# Altium PCB HMC1053-array.PcbDoc (part 2 of 4)
Units mm, origin at the board's own origin, x right, y up, seen from the top; angles counter-clockwise.
Board outline 90 x 90 mm, 4 copper layers (Top Layer (Signal), Int1 (GND), Int2 (Signal), Bottom Layer (Signal)), stack 1.586 mm thick; 151 components, 306 nets, 1178 pads, 350 vias.
Unrouted connection lines stored in the file: 80.
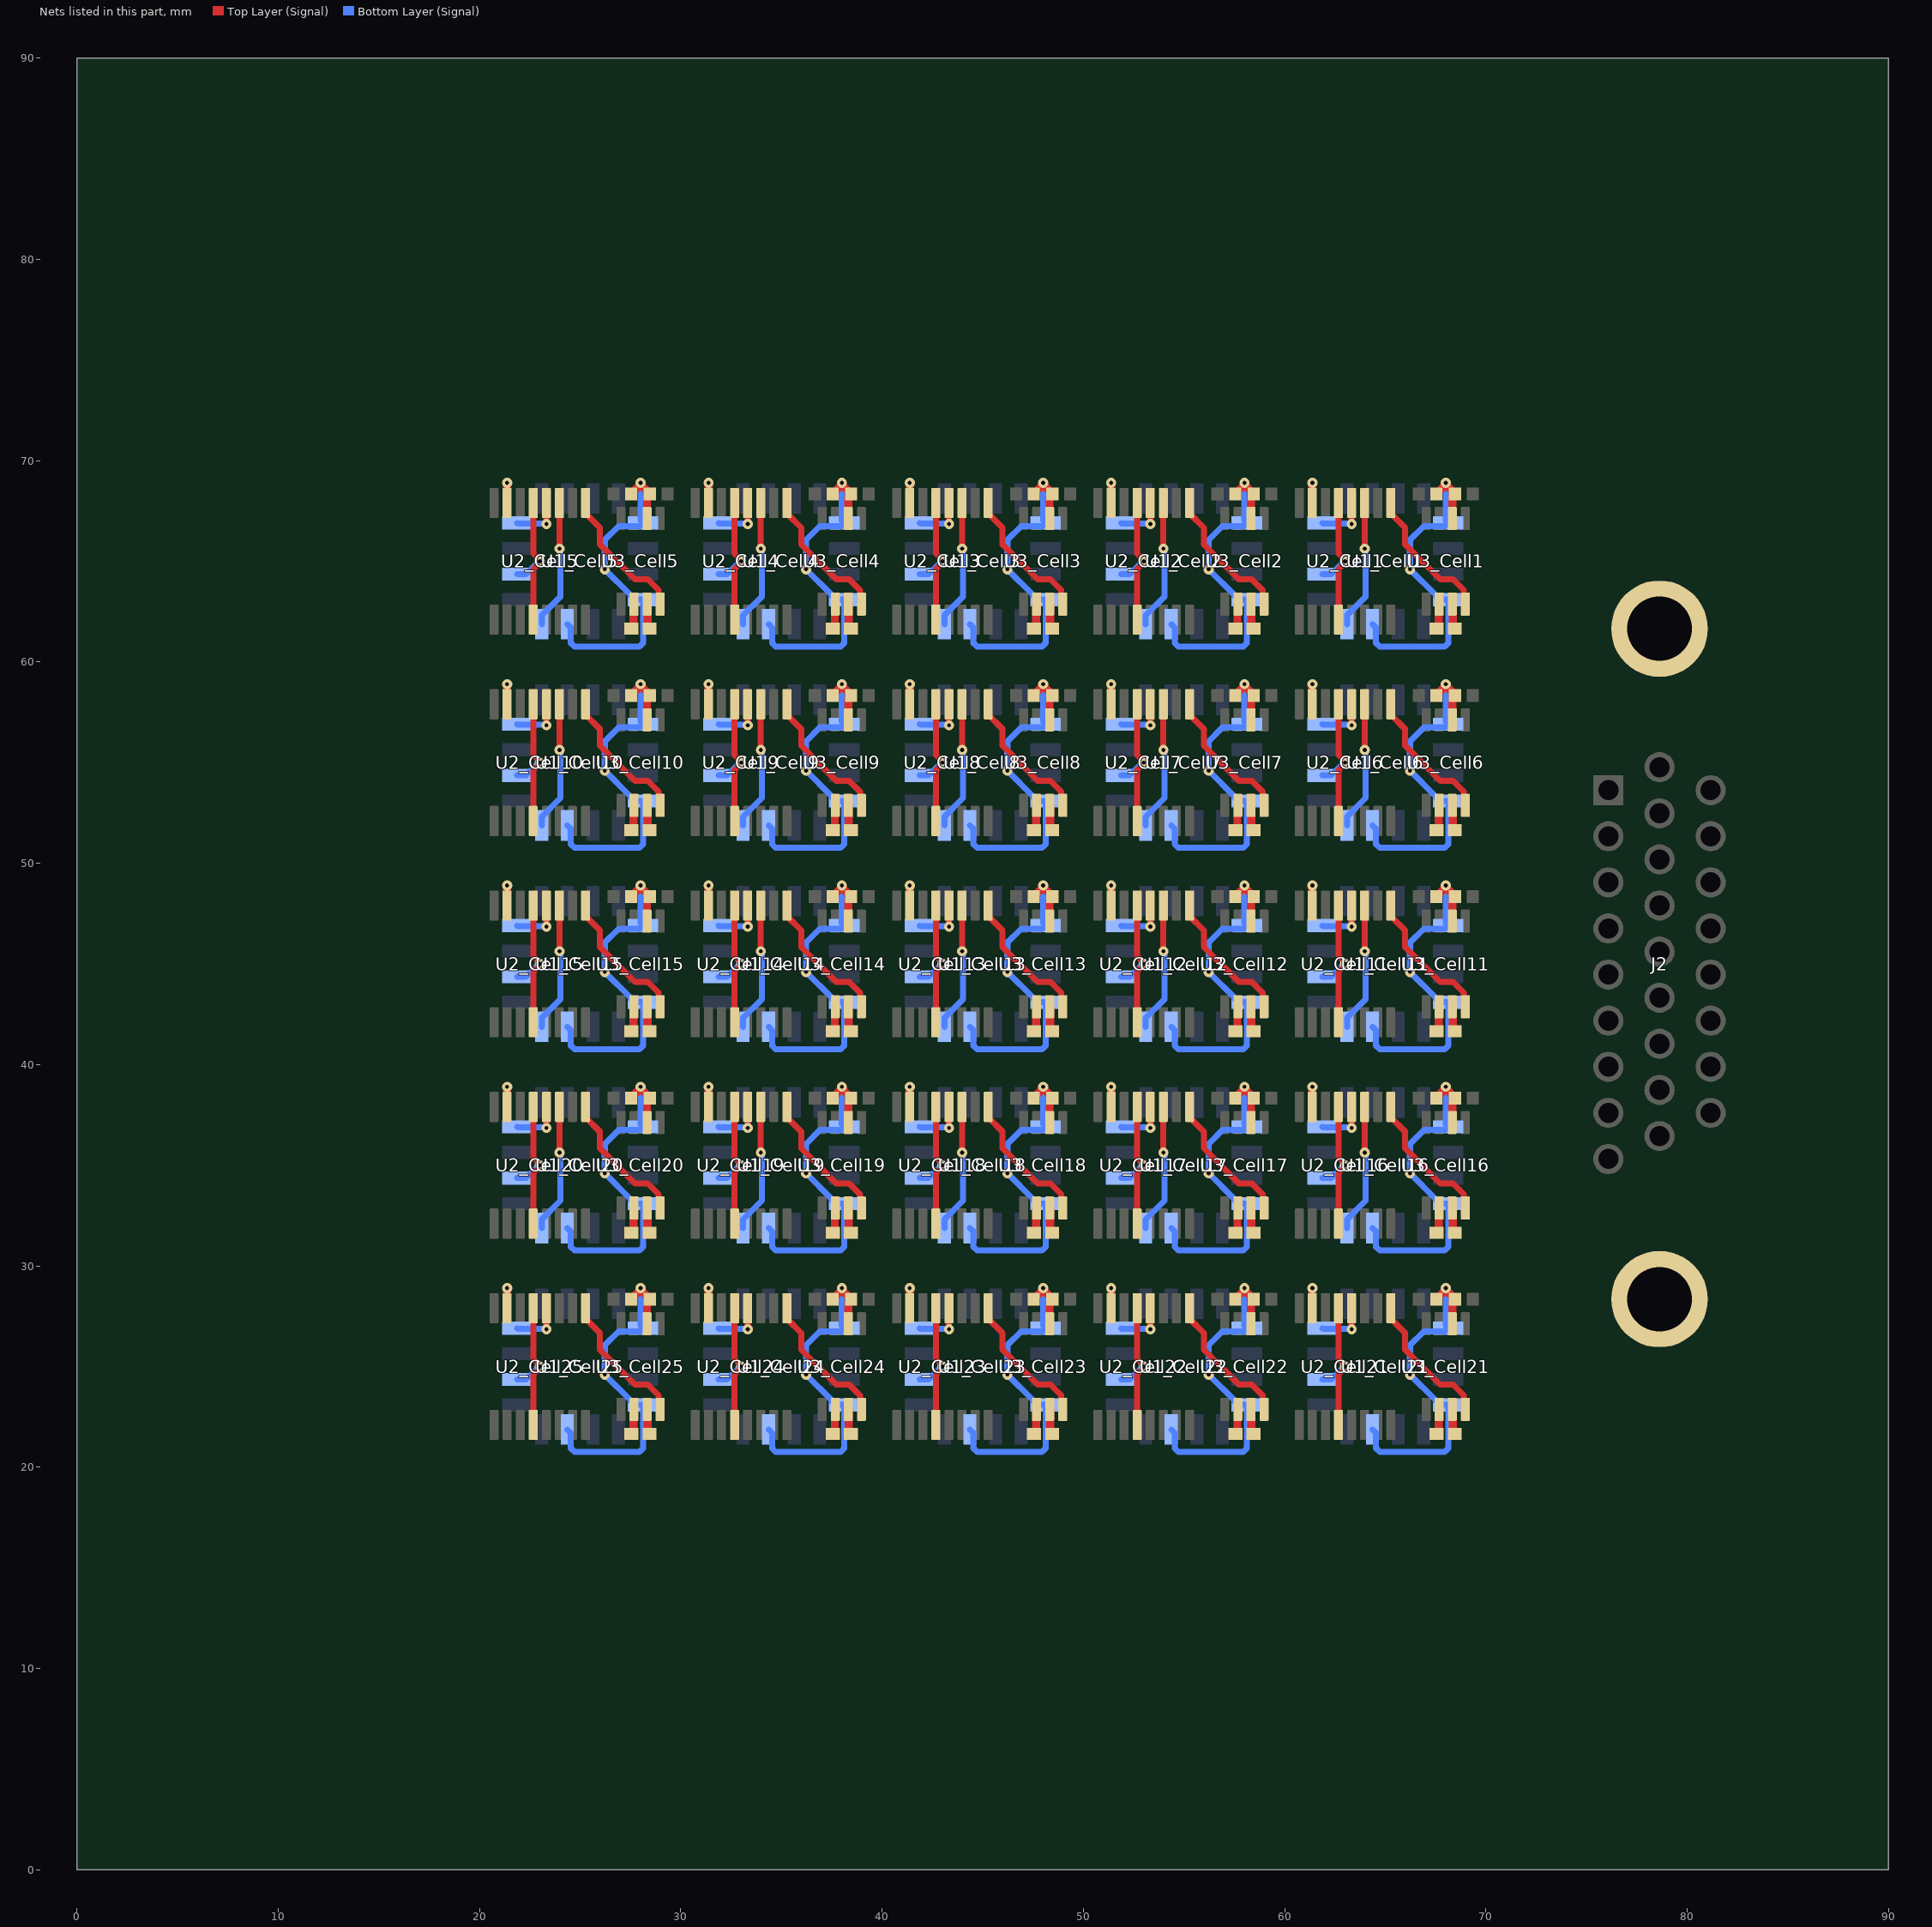
[diagram p4: the nets of this part, all layers, seen from the top]

## Via types
v1: diameter 0.5, hole 0.2, Top Layer (Signal) to Bottom Layer (Signal), 350 vias

## Nets (pads, with @x,y where several pads share a name; then routed paths per layer and width w, separated by ;. In a path a pad name is that pad's centre, name@x,y a point inside that pad or via, vN(x,y) a via of type N, cw(c..) or ccw(c..) an arc to the next point about the centre after c; other vN are vias at no path point) (continued)
GND: C1_Cell1.1 C1_Cell2.1 C1_Cell3.1 C1_Cell4.1 C1_Cell5.1 C1_Cell6.1 C1_Cell7.1 C1_Cell8.1 C1_Cell9.1 C1_Cell10.1 C1_Cell11.1 C1_Cell12.1 C1_Cell13.1 C1_Cell14.1 C1_Cell15.1 C1_Cell16.1 C1_Cell17.1 C1_Cell18.1 C1_Cell19.1 C1_Cell20.1 C1_Cell21.1 C1_Cell22.1 C1_Cell23.1 C1_Cell24.1 C1_Cell25.1 C2_Cell1.2 C2_Cell2.2 C2_Cell3.2 C2_Cell4.2 C2_Cell5.2 C2_Cell6.2 C2_Cell7.2 C2_Cell8.2 C2_Cell9.2 C2_Cell10.2 C2_Cell11.2 C2_Cell12.2 C2_Cell13.2 C2_Cell14.2 C2_Cell15.2 C2_Cell16.2 C2_Cell17.2 C2_Cell18.2 C2_Cell19.2 C2_Cell20.2 C2_Cell21.2 C2_Cell22.2 C2_Cell23.2 C2_Cell24.2 C2_Cell25.2 J2.M1 J2.M2 U1_Cell1.5 U1_Cell1.8 U1_Cell1.11 U1_Cell1.14 U1_Cell2.5 U1_Cell2.8 U1_Cell2.11 U1_Cell2.14 U1_Cell3.5 U1_Cell3.8 U1_Cell3.11 U1_Cell3.14 U1_Cell4.5 U1_Cell4.8 U1_Cell4.11 U1_Cell4.14 U1_Cell5.5 U1_Cell5.8 U1_Cell5.11 U1_Cell5.14 U1_Cell6.5 U1_Cell6.8 U1_Cell6.11 U1_Cell6.14 U1_Cell7.5 U1_Cell7.8 U1_Cell7.11 U1_Cell7.14 U1_Cell8.5 U1_Cell8.8 U1_Cell8.11 U1_Cell8.14 U1_Cell9.5 U1_Cell9.8 U1_Cell9.11 U1_Cell9.14 U1_Cell10.5 U1_Cell10.8 U1_Cell10.11 U1_Cell10.14 U1_Cell11.5 U1_Cell11.8 U1_Cell11.11 U1_Cell11.14 U1_Cell12.5 U1_Cell12.8 U1_Cell12.11 U1_Cell12.14 U1_Cell13.5 U1_Cell13.8 U1_Cell13.11 U1_Cell13.14 U1_Cell14.5 U1_Cell14.8 U1_Cell14.11 U1_Cell14.14 U1_Cell15.5 U1_Cell15.8 U1_Cell15.11 U1_Cell15.14 U1_Cell16.5 U1_Cell16.8 U1_Cell16.11 U1_Cell16.14 U1_Cell17.5 U1_Cell17.8 U1_Cell17.11 U1_Cell17.14 U1_Cell18.5 U1_Cell18.8 U1_Cell18.11 U1_Cell18.14 U1_Cell19.5 U1_Cell19.8 U1_Cell19.11 U1_Cell19.14 U1_Cell20.5 U1_Cell20.8 U1_Cell20.11 U1_Cell20.14 U1_Cell21.5 U1_Cell21.8 U1_Cell21.11 U1_Cell21.14 U1_Cell22.5 U1_Cell22.8 U1_Cell22.11 U1_Cell22.14 U1_Cell23.5 U1_Cell23.8 U1_Cell23.11 U1_Cell23.14 U1_Cell24.5 U1_Cell24.8 U1_Cell24.11 U1_Cell24.14 U1_Cell25.5 U1_Cell25.8 U1_Cell25.11 U1_Cell25.14 U2_Cell1.4 U2_Cell1.13 U2_Cell1.15 U2_Cell2.4 U2_Cell2.13 U2_Cell2.15 U2_Cell3.4 U2_Cell3.13 U2_Cell3.15 U2_Cell4.4 U2_Cell4.13 U2_Cell4.15 U2_Cell5.4 U2_Cell5.13 U2_Cell5.15 U2_Cell6.4 U2_Cell6.13 U2_Cell6.15 U2_Cell7.4 U2_Cell7.13 U2_Cell7.15 U2_Cell8.4 U2_Cell8.13 U2_Cell8.15 U2_Cell9.4 U2_Cell9.13 U2_Cell9.15 U2_Cell10.4 U2_Cell10.13 U2_Cell10.15 U2_Cell11.4 U2_Cell11.13 U2_Cell11.15 U2_Cell12.4 U2_Cell12.13 U2_Cell12.15 U2_Cell13.4 U2_Cell13.13 U2_Cell13.15 U2_Cell14.4 U2_Cell14.13 U2_Cell14.15 U2_Cell15.4 U2_Cell15.13 U2_Cell15.15 U2_Cell16.4 U2_Cell16.13 U2_Cell16.15 U2_Cell17.4 U2_Cell17.13 U2_Cell17.15 U2_Cell18.4 U2_Cell18.13 U2_Cell18.15 U2_Cell19.4 U2_Cell19.13 U2_Cell19.15 U2_Cell20.4 U2_Cell20.13 U2_Cell20.15 U2_Cell21.4 U2_Cell21.13 U2_Cell21.15 U2_Cell22.4 U2_Cell22.13 U2_Cell22.15 U2_Cell23.4 U2_Cell23.13 U2_Cell23.15 U2_Cell24.4 U2_Cell24.13 U2_Cell24.15 U2_Cell25.4 U2_Cell25.13 U2_Cell25.15 U3_Cell1.6 U3_Cell2.6 U3_Cell3.6 U3_Cell4.6 U3_Cell5.6 U3_Cell6.6 U3_Cell7.6 U3_Cell8.6 U3_Cell9.6 U3_Cell10.6 U3_Cell11.6 U3_Cell12.6 U3_Cell13.6 U3_Cell14.6 U3_Cell15.6 U3_Cell16.6 U3_Cell17.6 U3_Cell18.6 U3_Cell19.6 U3_Cell20.6 U3_Cell21.6 U3_Cell22.6 U3_Cell23.6 U3_Cell24.6 U3_Cell25.6 | length 665.2
  Top Layer (Signal) w0.3: U2_Cell25.4@22.675,22.1 22.675,24.621 23,24.946 v1(23,25) 23,25.054 22.675,25.379 U2_Cell25.13@22.675,27.9 ; U2_Cell20.4@22.675,32.1 22.675,34.621 23,34.946 v1(23,35) 23,35.054 22.675,35.379 U2_Cell20.13@22.675,37.9 ; U2_Cell15.4@22.675,42.1 22.675,44.621 23,44.946 v1(23,45) 23,45.054 22.675,45.379 U2_Cell15.13@22.675,47.9 ; U2_Cell10.4@22.675,52.1 22.675,54.621 23,54.946 v1(23,55) 23,55.054 22.675,55.379 U2_Cell10.13@22.675,57.9 ; U2_Cell5.4@22.675,62.1 22.675,64.621 23,64.946 v1(23,65) 23,65.054 22.675,65.379 U2_Cell5.13@22.675,67.9 ; v1@22.925,24.939 v1@22.925,25.019 ; v1@22.925,34.939 v1@22.925,35.019 ; v1@22.925,44.939 v1@22.925,45.019 ; v1@22.925,54.939 v1@22.925,55.019 ; v1@22.925,64.939 v1@22.925,65.019 ; U2_Cell24.4@32.675,22.1 32.675,24.621 33,24.946 v1(33,25) 33,25.054 32.675,25.379 U2_Cell24.13@32.675,27.9 ; U2_Cell19.4@32.675,32.1 32.675,34.621 33,34.946 v1(33,35) 33,35.054 32.675,35.379 U2_Cell19.13@32.675,37.9 ; U2_Cell14.4@32.675,42.1 32.675,44.621 33,44.946 v1(33,45) 33,45.054 32.675,45.379 U2_Cell14.13@32.675,47.9 ; U2_Cell9.4@32.675,52.1 32.675,54.621 33,54.946 v1(33,55) 33,55.054 32.675,55.379 U2_Cell9.13@32.675,57.9 ; U2_Cell4.4@32.675,62.1 32.675,64.621 33,64.946 v1(33,65) 33,65.054 32.675,65.379 U2_Cell4.13@32.675,67.9 ; v1@32.925,24.939 v1@32.925,25.019 ; v1@32.925,34.939 v1@32.925,35.019 ; v1@32.925,44.939 v1@32.925,45.019 ; v1@32.925,54.939 v1@32.925,55.019 ; v1@32.925,64.939 v1@32.925,65.019 ; U2_Cell23.4@42.675,22.1 42.675,24.621 43,24.946 v1(43,25) 43,25.054 42.675,25.379 U2_Cell23.13@42.675,27.9 ; U2_Cell18.4@42.675,32.1 42.675,34.621 43,34.946 v1(43,35) 43,35.054 42.675,35.379 U2_Cell18.13@42.675,37.9 ; U2_Cell13.4@42.675,42.1 42.675,44.621 43,44.946 v1(43,45) 43,45.054 42.675,45.379 U2_Cell13.13@42.675,47.9 ; U2_Cell8.4@42.675,52.1 42.675,54.621 43,54.946 v1(43,55) 43,55.054 42.675,55.379 U2_Cell8.13@42.675,57.9 ; U2_Cell3.4@42.675,62.1 42.675,64.621 43,64.946 v1(43,65) 43,65.054 42.675,65.379 U2_Cell3.13@42.675,67.9 ; v1@42.925,24.939 v1@42.925,25.019 ; v1@42.925,34.939 v1@42.925,35.019 ; v1@42.925,44.939 v1@42.925,45.019 ; v1@42.925,54.939 v1@42.925,55.019 ; v1@42.925,64.939 v1@42.925,65.019 ; U2_Cell22.4@52.675,22.1 52.675,24.621 53,24.946 v1(53,25) 53,25.054 52.675,25.379 U2_Cell22.13@52.675,27.9 ; U2_Cell17.4@52.675,32.1 52.675,34.621 53,34.946 v1(53,35) 53,35.054 52.675,35.379 U2_Cell17.13@52.675,37.9 ; U2_Cell12.4@52.675,42.1 52.675,44.621 53,44.946 v1(53,45) 53,45.054 52.675,45.379 U2_Cell12.13@52.675,47.9 ; U2_Cell7.4@52.675,52.1 52.675,54.621 53,54.946 v1(53,55) 53,55.054 52.675,55.379 U2_Cell7.13@52.675,57.9 ; U2_Cell2.4@52.675,62.1 52.675,64.621 53,64.946 v1(53,65) 53,65.054 52.675,65.379 U2_Cell2.13@52.675,67.9 ; v1@52.925,24.939 v1@52.925,25.019 ; v1@52.925,34.939 v1@52.925,35.019 ; v1@52.925,44.939 v1@52.925,45.019 ; v1@52.925,54.939 v1@52.925,55.019 ; v1@52.925,64.939 v1@52.925,65.019 ; U2_Cell21.4@62.675,22.1 62.675,24.621 63,24.946 v1(63,25) 63,25.054 62.675,25.379 U2_Cell21.13@62.675,27.9 ; U2_Cell16.4@62.675,32.1 62.675,34.621 63,34.946 v1(63,35) 63,35.054 62.675,35.379 U2_Cell16.13@62.675,37.9 ; U2_Cell11.4@62.675,42.1 62.675,44.621 63,44.946 v1(63,45) 63,45.054 62.675,45.379 U2_Cell11.13@62.675,47.9 ; U2_Cell6.4@62.675,52.1 62.675,54.621 63,54.946 v1(63,55) 63,55.054 62.675,55.379 U2_Cell6.13@62.675,57.9 ; U2_Cell1.4@62.675,62.1 62.675,64.621 63,64.946 v1(63,65) 63,65.054 62.675,65.379 U2_Cell1.13@62.675,67.9 ; v1@62.925,24.939 v1@62.925,25.019 ; v1@62.925,34.939 v1@62.925,35.019 ; v1@62.925,44.939 v1@62.925,45.019 ; v1@62.925,54.939 v1@62.925,55.019 ; v1@62.925,64.939 v1@62.925,65.019
  Top Layer (Signal) w0.4: U2_Cell25.15@21.375,27.9 v1(21.375,28.9) ; U2_Cell20.15@21.375,37.9 v1(21.375,38.9) ; U2_Cell15.15@21.375,47.9 v1(21.375,48.9) ; U2_Cell10.15@21.375,57.9 v1(21.375,58.9) ; U2_Cell5.15@21.375,67.9 v1(21.375,68.9) ; C1_Cell25.1@27.64,28.435 C1_Cell25.1@27.54,28.335 27.54,28.355 27.981,28.796 27.981,28.881 v1(28,28.9) 28.019,28.881 28.019,28.796 28.36,28.455 28.36,28.435 C2_Cell25.2@28.46,28.335 28.46,28.315 28.325,28.18 U3_Cell25.6@28.325,27.125 ; C1_Cell20.1@27.64,38.435 C1_Cell20.1@27.54,38.335 27.54,38.355 27.981,38.796 27.981,38.881 v1(28,38.9) 28.019,38.881 28.019,38.796 28.36,38.455 28.36,38.435 C2_Cell20.2@28.46,38.335 28.46,38.315 28.325,38.18 U3_Cell20.6@28.325,37.125 ; C1_Cell15.1@27.64,48.435 C1_Cell15.1@27.54,48.335 27.54,48.355 27.981,48.796 27.981,48.881 v1(28,48.9) 28.019,48.881 28.019,48.796 28.36,48.455 28.36,48.435 C2_Cell15.2@28.46,48.335 28.46,48.315 28.325,48.18 U3_Cell15.6@28.325,47.125 ; C1_Cell10.1@27.64,58.435 C1_Cell10.1@27.54,58.335 27.54,58.355 27.981,58.796 27.981,58.881 v1(28,58.9) 28.019,58.881 28.019,58.796 28.36,58.455 28.36,58.435 C2_Cell10.2@28.46,58.335 28.46,58.315 28.325,58.18 U3_Cell10.6@28.325,57.125 ; C1_Cell5.1@27.64,68.435 C1_Cell5.1@27.54,68.335 27.54,68.355 27.981,68.796 27.981,68.881 v1(28,68.9) 28.019,68.881 28.019,68.796 28.36,68.455 28.36,68.435 C2_Cell5.2@28.46,68.335 28.46,68.315 28.325,68.18 U3_Cell5.6@28.325,67.125 ; U2_Cell24.15@31.375,27.9 v1(31.375,28.9) ; U2_Cell19.15@31.375,37.9 v1(31.375,38.9) ; U2_Cell14.15@31.375,47.9 v1(31.375,48.9) ; U2_Cell9.15@31.375,57.9 v1(31.375,58.9) ; U2_Cell4.15@31.375,67.9 v1(31.375,68.9) ; C1_Cell24.1@37.64,28.435 C1_Cell24.1@37.54,28.335 37.54,28.355 37.981,28.796 37.981,28.881 v1(38,28.9) 38.019,28.881 38.019,28.796 38.36,28.455 38.36,28.435 C2_Cell24.2@38.46,28.335 38.46,28.315 38.325,28.18 U3_Cell24.6@38.325,27.125 ; C1_Cell19.1@37.64,38.435 C1_Cell19.1@37.54,38.335 37.54,38.355 37.981,38.796 37.981,38.881 v1(38,38.9) 38.019,38.881 38.019,38.796 38.36,38.455 38.36,38.435 C2_Cell19.2@38.46,38.335 38.46,38.315 38.325,38.18 U3_Cell19.6@38.325,37.125 ; C1_Cell14.1@37.64,48.435 C1_Cell14.1@37.54,48.335 37.54,48.355 37.981,48.796 37.981,48.881 v1(38,48.9) 38.019,48.881 38.019,48.796 38.36,48.455 38.36,48.435 C2_Cell14.2@38.46,48.335 38.46,48.315 38.325,48.18 U3_Cell14.6@38.325,47.125 ; C1_Cell9.1@37.64,58.435 C1_Cell9.1@37.54,58.335 37.54,58.355 37.981,58.796 37.981,58.881 v1(38,58.9) 38.019,58.881 38.019,58.796 38.36,58.455 38.36,58.435 C2_Cell9.2@38.46,58.335 38.46,58.315 38.325,58.18 U3_Cell9.6@38.325,57.125 ; C1_Cell4.1@37.64,68.435 C1_Cell4.1@37.54,68.335 37.54,68.355 37.981,68.796 37.981,68.881 v1(38,68.9) 38.019,68.881 38.019,68.796 38.36,68.455 38.36,68.435 C2_Cell4.2@38.46,68.335 38.46,68.315 38.325,68.18 U3_Cell4.6@38.325,67.125 ; U2_Cell23.15@41.375,27.9 v1(41.375,28.9) ; U2_Cell18.15@41.375,37.9 v1(41.375,38.9) ; U2_Cell13.15@41.375,47.9 v1(41.375,48.9) ; U2_Cell8.15@41.375,57.9 v1(41.375,58.9) ; U2_Cell3.15@41.375,67.9 v1(41.375,68.9) ; C1_Cell23.1@47.64,28.435 C1_Cell23.1@47.54,28.335 47.54,28.355 47.981,28.796 47.981,28.881 v1(48,28.9) 48.019,28.881 48.019,28.796 48.36,28.455 48.36,28.435 C2_Cell23.2@48.46,28.335 48.46,28.315 48.325,28.18 U3_Cell23.6@48.325,27.125 ; C1_Cell18.1@47.64,38.435 C1_Cell18.1@47.54,38.335 47.54,38.355 47.981,38.796 47.981,38.881 v1(48,38.9) 48.019,38.881 48.019,38.796 48.36,38.455 48.36,38.435 C2_Cell18.2@48.46,38.335 48.46,38.315 48.325,38.18 U3_Cell18.6@48.325,37.125 ; C1_Cell13.1@47.64,48.435 C1_Cell13.1@47.54,48.335 47.54,48.355 47.981,48.796 47.981,48.881 v1(48,48.9) 48.019,48.881 48.019,48.796 48.36,48.455 48.36,48.435 C2_Cell13.2@48.46,48.335 48.46,48.315 48.325,48.18 U3_Cell13.6@48.325,47.125 ; C1_Cell8.1@47.64,58.435 C1_Cell8.1@47.54,58.335 47.54,58.355 47.981,58.796 47.981,58.881 v1(48,58.9) 48.019,58.881 48.019,58.796 48.36,58.455 48.36,58.435 C2_Cell8.2@48.46,58.335 48.46,58.315 48.325,58.18 U3_Cell8.6@48.325,57.125 ; C1_Cell3.1@47.64,68.435 C1_Cell3.1@47.54,68.335 47.54,68.355 47.981,68.796 47.981,68.881 v1(48,68.9) 48.019,68.881 48.019,68.796 48.36,68.455 48.36,68.435 C2_Cell3.2@48.46,68.335 48.46,68.315 48.325,68.18 U3_Cell3.6@48.325,67.125 ; U2_Cell22.15@51.375,27.9 v1(51.375,28.9) ; U2_Cell17.15@51.375,37.9 v1(51.375,38.9) ; U2_Cell12.15@51.375,47.9 v1(51.375,48.9) ; U2_Cell7.15@51.375,57.9 v1(51.375,58.9) ; U2_Cell2.15@51.375,67.9 v1(51.375,68.9) ; C1_Cell22.1@57.64,28.435 C1_Cell22.1@57.54,28.335 57.54,28.355 57.981,28.796 57.981,28.881 v1(58,28.9) 58.019,28.881 58.019,28.796 58.36,28.455 58.36,28.435 C2_Cell22.2@58.46,28.335 58.46,28.315 58.325,28.18 U3_Cell22.6@58.325,27.125 ; C1_Cell17.1@57.64,38.435 C1_Cell17.1@57.54,38.335 57.54,38.355 57.981,38.796 57.981,38.881 v1(58,38.9) 58.019,38.881 58.019,38.796 58.36,38.455 58.36,38.435 C2_Cell17.2@58.46,38.335 58.46,38.315 58.325,38.18 U3_Cell17.6@58.325,37.125 ; C1_Cell12.1@57.64,48.435 C1_Cell12.1@57.54,48.335 57.54,48.355 57.981,48.796 57.981,48.881 v1(58,48.9) 58.019,48.881 58.019,48.796 58.36,48.455 58.36,48.435 C2_Cell12.2@58.46,48.335 58.46,48.315 58.325,48.18 U3_Cell12.6@58.325,47.125 ; C1_Cell7.1@57.64,58.435 C1_Cell7.1@57.54,58.335 57.54,58.355 57.981,58.796 57.981,58.881 v1(58,58.9) 58.019,58.881 58.019,58.796 58.36,58.455 58.36,58.435 C2_Cell7.2@58.46,58.335 58.46,58.315 58.325,58.18 U3_Cell7.6@58.325,57.125 ; C1_Cell2.1@57.64,68.435 C1_Cell2.1@57.54,68.335 57.54,68.355 57.981,68.796 57.981,68.881 v1(58,68.9) 58.019,68.881 58.019,68.796 58.36,68.455 58.36,68.435 C2_Cell2.2@58.46,68.335 58.46,68.315 58.325,68.18 U3_Cell2.6@58.325,67.125 ; U2_Cell21.15@61.375,27.9 v1(61.375,28.9) ; U2_Cell16.15@61.375,37.9 v1(61.375,38.9) ; U2_Cell11.15@61.375,47.9 v1(61.375,48.9) ; U2_Cell6.15@61.375,57.9 v1(61.375,58.9) ; U2_Cell1.15@61.375,67.9 v1(61.375,68.9) ; C1_Cell21.1@67.64,28.435 C1_Cell21.1@67.54,28.335 67.54,28.355 67.981,28.796 67.981,28.881 v1(68,28.9) 68.019,28.881 68.019,28.796 68.36,28.455 68.36,28.435 C2_Cell21.2@68.46,28.335 68.46,28.315 68.325,28.18 U3_Cell21.6@68.325,27.125 ; C1_Cell16.1@67.64,38.435 C1_Cell16.1@67.54,38.335 67.54,38.355 67.981,38.796 67.981,38.881 v1(68,38.9) 68.019,38.881 68.019,38.796 68.36,38.455 68.36,38.435 C2_Cell16.2@68.46,38.335 68.46,38.315 68.325,38.18 U3_Cell16.6@68.325,37.125 ; C1_Cell11.1@67.64,48.435 C1_Cell11.1@67.54,48.335 67.54,48.355 67.981,48.796 67.981,48.881 v1(68,48.9) 68.019,48.881 68.019,48.796 68.36,48.455 68.36,48.435 C2_Cell11.2@68.46,48.335 68.46,48.315 68.325,48.18 U3_Cell11.6@68.325,47.125 ; C1_Cell6.1@67.64,58.435 C1_Cell6.1@67.54,58.335 67.54,58.355 67.981,58.796 67.981,58.881 v1(68,58.9) 68.019,58.881 68.019,58.796 68.36,58.455 68.36,58.435 C2_Cell6.2@68.46,58.335 68.46,58.315 68.325,58.18 U3_Cell6.6@68.325,57.125 ; C1_Cell1.1@67.64,68.435 C1_Cell1.1@67.54,68.335 67.54,68.355 67.981,68.796 67.981,68.881 v1(68,68.9) 68.019,68.881 68.019,68.796 68.36,68.455 68.36,68.435 C2_Cell1.2@68.46,68.335 68.46,68.315 68.325,68.18 U3_Cell1.6@68.325,67.125
  Bottom Layer (Signal) w0.3: U1_Cell25.14@21.876,24.365 22.311,24.365 22.911,24.965 22.925,24.965 v1@22.963,25.003 ; U1_Cell20.14@21.876,34.365 22.311,34.365 22.911,34.965 22.925,34.965 v1@22.963,35.003 ; U1_Cell15.14@21.876,44.365 22.311,44.365 22.911,44.965 22.925,44.965 v1@22.963,45.003 ; U1_Cell10.14@21.876,54.365 22.311,54.365 22.911,54.965 22.925,54.965 v1@22.963,55.003 ; U1_Cell5.14@21.876,64.365 22.311,64.365 22.911,64.965 22.925,64.965 v1@22.963,65.003 ; U1_Cell25.11@24.365,21.877 24.54,21.702 24.54,20.943 24.716,20.767 27.948,20.767 28.124,20.943 U1_Cell25.8@28.124,23.095 27.689,23.095 27.514,23.27 27.514,23.311 v1(26.225,24.6) 26.225,26.06 26.914,26.749 27.968,26.749 U1_Cell25.5@28.124,26.905 28,27.029 v1(28,28.9) ; U1_Cell20.11@24.365,31.877 24.54,31.702 24.54,30.943 24.716,30.767 27.948,30.767 28.124,30.943 U1_Cell20.8@28.124,33.095 27.689,33.095 27.514,33.27 27.514,33.311 v1(26.225,34.6) 26.225,36.06 26.914,36.749 27.968,36.749 U1_Cell20.5@28.124,36.905 28,37.029 v1(28,38.9) ; U1_Cell15.11@24.365,41.877 24.54,41.702 24.54,40.943 24.716,40.767 27.948,40.767 28.124,40.943 U1_Cell15.8@28.124,43.095 27.689,43.095 27.514,43.27 27.514,43.311 v1(26.225,44.6) 26.225,46.06 26.914,46.749 27.968,46.749 U1_Cell15.5@28.124,46.905 28,47.029 v1(28,48.9) ; U1_Cell10.11@24.365,51.877 24.54,51.702 24.54,50.943 24.716,50.767 27.948,50.767 28.124,50.943 U1_Cell10.8@28.124,53.095 27.689,53.095 27.514,53.27 27.514,53.311 v1(26.225,54.6) 26.225,56.06 26.914,56.749 27.968,56.749 U1_Cell10.5@28.124,56.905 28,57.029 v1(28,58.9) ; U1_Cell5.11@24.365,61.877 24.54,61.702 24.54,60.943 24.716,60.767 27.948,60.767 28.124,60.943 U1_Cell5.8@28.124,63.095 27.689,63.095 27.514,63.27 27.514,63.311 v1(26.225,64.6) 26.225,66.06 26.914,66.749 27.968,66.749 U1_Cell5.5@28.124,66.905 28,67.029 v1(28,68.9) ; U1_Cell24.14@31.876,24.365 32.311,24.365 32.911,24.965 32.925,24.965 v1@32.963,25.003 ; U1_Cell19.14@31.876,34.365 32.311,34.365 32.911,34.965 32.925,34.965 v1@32.963,35.003 ; U1_Cell14.14@31.876,44.365 32.311,44.365 32.911,44.965 32.925,44.965 v1@32.963,45.003 ; U1_Cell9.14@31.876,54.365 32.311,54.365 32.911,54.965 32.925,54.965 v1@32.963,55.003 ; U1_Cell4.14@31.876,64.365 32.311,64.365 32.911,64.965 32.925,64.965 v1@32.963,65.003 ; U1_Cell24.11@34.365,21.877 34.54,21.702 34.54,20.943 34.716,20.767 37.948,20.767 38.124,20.943 U1_Cell24.8@38.124,23.095 37.689,23.095 37.514,23.27 37.514,23.311 v1(36.225,24.6) 36.225,26.06 36.914,26.749 37.968,26.749 U1_Cell24.5@38.124,26.905 38,27.029 v1(38,28.9) ; U1_Cell19.11@34.365,31.877 34.54,31.702 34.54,30.943 34.716,30.767 37.948,30.767 38.124,30.943 U1_Cell19.8@38.124,33.095 37.689,33.095 37.514,33.27 37.514,33.311 v1(36.225,34.6) 36.225,36.06 36.914,36.749 37.968,36.749 U1_Cell19.5@38.124,36.905 38,37.029 v1(38,38.9) ; U1_Cell14.11@34.365,41.877 34.54,41.702 34.54,40.943 34.716,40.767 37.948,40.767 38.124,40.943 U1_Cell14.8@38.124,43.095 37.689,43.095 37.514,43.27 37.514,43.311 v1(36.225,44.6) 36.225,46.06 36.914,46.749 37.968,46.749 U1_Cell14.5@38.124,46.905 38,47.029 v1(38,48.9) ; U1_Cell9.11@34.365,51.877 34.54,51.702 34.54,50.943 34.716,50.767 37.948,50.767 38.124,50.943 U1_Cell9.8@38.124,53.095 37.689,53.095 37.514,53.27 37.514,53.311 v1(36.225,54.6) 36.225,56.06 36.914,56.749 37.968,56.749 U1_Cell9.5@38.124,56.905 38,57.029 v1(38,58.9) ; U1_Cell4.11@34.365,61.877 34.54,61.702 34.54,60.943 34.716,60.767 37.948,60.767 38.124,60.943 U1_Cell4.8@38.124,63.095 37.689,63.095 37.514,63.27 37.514,63.311 v1(36.225,64.6) 36.225,66.06 36.914,66.749 37.968,66.749 U1_Cell4.5@38.124,66.905 38,67.029 v1(38,68.9) ; U1_Cell23.14@41.876,24.365 42.311,24.365 42.911,24.965 42.925,24.965 v1@42.963,25.003 ; U1_Cell18.14@41.876,34.365 42.311,34.365 42.911,34.965 42.925,34.965 v1@42.963,35.003 ; U1_Cell13.14@41.876,44.365 42.311,44.365 42.911,44.965 42.925,44.965 v1@42.963,45.003 ; U1_Cell8.14@41.876,54.365 42.311,54.365 42.911,54.965 42.925,54.965 v1@42.963,55.003 ; U1_Cell3.14@41.876,64.365 42.311,64.365 42.911,64.965 42.925,64.965 v1@42.963,65.003 ; U1_Cell23.11@44.365,21.877 44.54,21.702 44.54,20.943 44.716,20.767 47.948,20.767 48.124,20.943 U1_Cell23.8@48.124,23.095 47.689,23.095 47.514,23.27 47.514,23.311 v1(46.225,24.6) 46.225,26.06 46.914,26.749 47.968,26.749 U1_Cell23.5@48.124,26.905 48,27.029 v1(48,28.9) ; U1_Cell18.11@44.365,31.877 44.54,31.702 44.54,30.943 44.716,30.767 47.948,30.767 48.124,30.943 U1_Cell18.8@48.124,33.095 47.689,33.095 47.514,33.27 47.514,33.311 v1(46.225,34.6) 46.225,36.06 46.914,36.749 47.968,36.749 U1_Cell18.5@48.124,36.905 48,37.029 v1(48,38.9) ; U1_Cell13.11@44.365,41.877 44.54,41.702 44.54,40.943 44.716,40.767 47.948,40.767 48.124,40.943 U1_Cell13.8@48.124,43.095 47.689,43.095 47.514,43.27 47.514,43.311 v1(46.225,44.6) 46.225,46.06 46.914,46.749 47.968,46.749 U1_Cell13.5@48.124,46.905 48,47.029 v1(48,48.9) ; U1_Cell8.11@44.365,51.877 44.54,51.702 44.54,50.943 44.716,50.767 47.948,50.767 48.124,50.943 U1_Cell8.8@48.124,53.095 47.689,53.095 47.514,53.27 47.514,53.311 v1(46.225,54.6) 46.225,56.06 46.914,56.749 47.968,56.749 U1_Cell8.5@48.124,56.905 48,57.029 v1(48,58.9) ; U1_Cell3.11@44.365,61.877 44.54,61.702 44.54,60.943 44.716,60.767 47.948,60.767 48.124,60.943 U1_Cell3.8@48.124,63.095 47.689,63.095 47.514,63.27 47.514,63.311 v1(46.225,64.6) 46.225,66.06 46.914,66.749 47.968,66.749 U1_Cell3.5@48.124,66.905 48,67.029 v1(48,68.9) ; U1_Cell22.14@51.876,24.365 52.311,24.365 52.911,24.965 52.925,24.965 v1@52.963,25.003 ; U1_Cell17.14@51.876,34.365 52.311,34.365 52.911,34.965 52.925,34.965 v1@52.963,35.003 ; U1_Cell12.14@51.876,44.365 52.311,44.365 52.911,44.965 52.925,44.965 v1@52.963,45.003 ; U1_Cell7.14@51.876,54.365 52.311,54.365 52.911,54.965 52.925,54.965 v1@52.963,55.003 ; U1_Cell2.14@51.876,64.365 52.311,64.365 52.911,64.965 52.925,64.965 v1@52.963,65.003 ; U1_Cell22.11@54.365,21.877 54.54,21.702 54.54,20.943 54.716,20.767 57.948,20.767 58.124,20.943 U1_Cell22.8@58.124,23.095 57.689,23.095 57.514,23.27 57.514,23.311 v1(56.225,24.6) 56.225,26.06 56.914,26.749 57.968,26.749 U1_Cell22.5@58.124,26.905 58,27.029 v1(58,28.9) ; U1_Cell17.11@54.365,31.877 54.54,31.702 54.54,30.943 54.716,30.767 57.948,30.767 58.124,30.943 U1_Cell17.8@58.124,33.095 57.689,33.095 57.514,33.27 57.514,33.311 v1(56.225,34.6) 56.225,36.06 56.914,36.749 57.968,36.749 U1_Cell17.5@58.124,36.905 58,37.029 v1(58,38.9) ; U1_Cell12.11@54.365,41.877 54.54,41.702 54.54,40.943 54.716,40.767 57.948,40.767 58.124,40.943 U1_Cell12.8@58.124,43.095 57.689,43.095 57.514,43.27 57.514,43.311 v1(56.225,44.6) 56.225,46.06 56.914,46.749 57.968,46.749 U1_Cell12.5@58.124,46.905 58,47.029 v1(58,48.9) ; U1_Cell7.11@54.365,51.877 54.54,51.702 54.54,50.943 54.716,50.767 57.948,50.767 58.124,50.943 U1_Cell7.8@58.124,53.095 57.689,53.095 57.514,53.27 57.514,53.311 v1(56.225,54.6) 56.225,56.06 56.914,56.749 57.968,56.749 U1_Cell7.5@58.124,56.905 58,57.029 v1(58,58.9) ; U1_Cell2.11@54.365,61.877 54.54,61.702 54.54,60.943 54.716,60.767 57.948,60.767 58.124,60.943 U1_Cell2.8@58.124,63.095 57.689,63.095 57.514,63.27 57.514,63.311 v1(56.225,64.6) 56.225,66.06 56.914,66.749 57.968,66.749 U1_Cell2.5@58.124,66.905 58,67.029 v1(58,68.9) ; U1_Cell21.14@61.876,24.365 62.311,24.365 62.911,24.965 62.925,24.965 v1@62.963,25.003 ; U1_Cell16.14@61.876,34.365 62.311,34.365 62.911,34.965 62.925,34.965 v1@62.963,35.003 ; U1_Cell11.14@61.876,44.365 62.311,44.365 62.911,44.965 62.925,44.965 v1@62.963,45.003 ; U1_Cell6.14@61.876,54.365 62.311,54.365 62.911,54.965 62.925,54.965 v1@62.963,55.003 ; U1_Cell1.14@61.876,64.365 62.311,64.365 62.911,64.965 62.925,64.965 v1@62.963,65.003 ; U1_Cell21.11@64.365,21.877 64.54,21.702 64.54,20.943 64.716,20.767 67.948,20.767 68.124,20.943 U1_Cell21.8@68.124,23.095 67.689,23.095 67.514,23.27 67.514,23.311 v1(66.225,24.6) 66.225,26.06 66.914,26.749 67.968,26.749 U1_Cell21.5@68.124,26.905 68,27.029 v1(68,28.9) ; U1_Cell16.11@64.365,31.877 64.54,31.702 64.54,30.943 64.716,30.767 67.948,30.767 68.124,30.943 U1_Cell16.8@68.124,33.095 67.689,33.095 67.514,33.27 67.514,33.311 v1(66.225,34.6) 66.225,36.06 66.914,36.749 67.968,36.749 U1_Cell16.5@68.124,36.905 68,37.029 v1(68,38.9) ; U1_Cell11.11@64.365,41.877 64.54,41.702 64.54,40.943 64.716,40.767 67.948,40.767 68.124,40.943 U1_Cell11.8@68.124,43.095 67.689,43.095 67.514,43.27 67.514,43.311 v1(66.225,44.6) 66.225,46.06 66.914,46.749 67.968,46.749 U1_Cell11.5@68.124,46.905 68,47.029 v1(68,48.9) ; U1_Cell6.11@64.365,51.877 64.54,51.702 64.54,50.943 64.716,50.767 67.948,50.767 68.124,50.943 U1_Cell6.8@68.124,53.095 67.689,53.095 67.514,53.27 67.514,53.311 v1(66.225,54.6) 66.225,56.06 66.914,56.749 67.968,56.749 U1_Cell6.5@68.124,56.905 68,57.029 v1(68,58.9) ; U1_Cell1.11@64.365,61.877 64.54,61.702 64.54,60.943 64.716,60.767 67.948,60.767 68.124,60.943 U1_Cell1.8@68.124,63.095 67.689,63.095 67.514,63.27 67.514,63.311 v1(66.225,64.6) 66.225,66.06 66.914,66.749 67.968,66.749 U1_Cell1.5@68.124,66.905 68,67.029 v1(68,68.9)
NetR1_Cell1_1: R1_Cell1.1 U3_Cell1.2 | length 1.3
  Top Layer (Signal) w0.4: R1_Cell1.1@67.55,61.65 67.65,61.75 67.65,62.85 U3_Cell1.2@67.675,62.875
NetR1_Cell1_2: R1_Cell1.2 U3_Cell1.3 | length 1.3
  Top Layer (Signal) w0.4: U3_Cell1.3@68.325,62.875 68.35,62.85 68.35,61.75 R1_Cell1.2@68.45,61.65
NetR1_Cell2_1: R1_Cell2.1 U3_Cell2.2 | length 1.3
  Top Layer (Signal) w0.4: R1_Cell2.1@57.55,61.65 57.65,61.75 57.65,62.85 U3_Cell2.2@57.675,62.875
NetR1_Cell2_2: R1_Cell2.2 U3_Cell2.3 | length 1.3
  Top Layer (Signal) w0.4: U3_Cell2.3@58.325,62.875 58.35,62.85 58.35,61.75 R1_Cell2.2@58.45,61.65
NetR1_Cell3_1: R1_Cell3.1 U3_Cell3.2 | length 1.3
  Top Layer (Signal) w0.4: R1_Cell3.1@47.55,61.65 47.65,61.75 47.65,62.85 U3_Cell3.2@47.675,62.875
NetR1_Cell3_2: R1_Cell3.2 U3_Cell3.3 | length 1.3
  Top Layer (Signal) w0.4: U3_Cell3.3@48.325,62.875 48.35,62.85 48.35,61.75 R1_Cell3.2@48.45,61.65
NetR1_Cell4_1: R1_Cell4.1 U3_Cell4.2 | length 1.3
  Top Layer (Signal) w0.4: R1_Cell4.1@37.55,61.65 37.65,61.75 37.65,62.85 U3_Cell4.2@37.675,62.875
NetR1_Cell4_2: R1_Cell4.2 U3_Cell4.3 | length 1.3
  Top Layer (Signal) w0.4: U3_Cell4.3@38.325,62.875 38.35,62.85 38.35,61.75 R1_Cell4.2@38.45,61.65
NetR1_Cell5_1: R1_Cell5.1 U3_Cell5.2 | length 1.3
  Top Layer (Signal) w0.4: R1_Cell5.1@27.55,61.65 27.65,61.75 27.65,62.85 U3_Cell5.2@27.675,62.875
NetR1_Cell5_2: R1_Cell5.2 U3_Cell5.3 | length 1.3
  Top Layer (Signal) w0.4: U3_Cell5.3@28.325,62.875 28.35,62.85 28.35,61.75 R1_Cell5.2@28.45,61.65
NetR1_Cell6_1: R1_Cell6.1 U3_Cell6.2 | length 1.3
  Top Layer (Signal) w0.4: R1_Cell6.1@67.55,51.65 67.65,51.75 67.65,52.85 U3_Cell6.2@67.675,52.875
NetR1_Cell6_2: R1_Cell6.2 U3_Cell6.3 | length 1.3
  Top Layer (Signal) w0.4: U3_Cell6.3@68.325,52.875 68.35,52.85 68.35,51.75 R1_Cell6.2@68.45,51.65
NetR1_Cell7_1: R1_Cell7.1 U3_Cell7.2 | length 1.3
  Top Layer (Signal) w0.4: R1_Cell7.1@57.55,51.65 57.65,51.75 57.65,52.85 U3_Cell7.2@57.675,52.875
NetR1_Cell7_2: R1_Cell7.2 U3_Cell7.3 | length 1.3
  Top Layer (Signal) w0.4: U3_Cell7.3@58.325,52.875 58.35,52.85 58.35,51.75 R1_Cell7.2@58.45,51.65
NetR1_Cell8_1: R1_Cell8.1 U3_Cell8.2 | length 1.3
  Top Layer (Signal) w0.4: R1_Cell8.1@47.55,51.65 47.65,51.75 47.65,52.85 U3_Cell8.2@47.675,52.875
NetR1_Cell8_2: R1_Cell8.2 U3_Cell8.3 | length 1.3
  Top Layer (Signal) w0.4: U3_Cell8.3@48.325,52.875 48.35,52.85 48.35,51.75 R1_Cell8.2@48.45,51.65
NetR1_Cell9_1: R1_Cell9.1 U3_Cell9.2 | length 1.3
  Top Layer (Signal) w0.4: R1_Cell9.1@37.55,51.65 37.65,51.75 37.65,52.85 U3_Cell9.2@37.675,52.875
NetR1_Cell9_2: R1_Cell9.2 U3_Cell9.3 | length 1.3
  Top Layer (Signal) w0.4: U3_Cell9.3@38.325,52.875 38.35,52.85 38.35,51.75 R1_Cell9.2@38.45,51.65
NetR1_Cell10_1: R1_Cell10.1 U3_Cell10.2 | length 1.3
  Top Layer (Signal) w0.4: R1_Cell10.1@27.55,51.65 27.65,51.75 27.65,52.85 U3_Cell10.2@27.675,52.875
NetR1_Cell10_2: R1_Cell10.2 U3_Cell10.3 | length 1.3
  Top Layer (Signal) w0.4: U3_Cell10.3@28.325,52.875 28.35,52.85 28.35,51.75 R1_Cell10.2@28.45,51.65
NetR1_Cell11_1: R1_Cell11.1 U3_Cell11.2 | length 1.3
  Top Layer (Signal) w0.4: R1_Cell11.1@67.55,41.65 67.65,41.75 67.65,42.85 U3_Cell11.2@67.675,42.875
NetR1_Cell11_2: R1_Cell11.2 U3_Cell11.3 | length 1.3
  Top Layer (Signal) w0.4: U3_Cell11.3@68.325,42.875 68.35,42.85 68.35,41.75 R1_Cell11.2@68.45,41.65
NetR1_Cell12_1: R1_Cell12.1 U3_Cell12.2 | length 1.3
  Top Layer (Signal) w0.4: R1_Cell12.1@57.55,41.65 57.65,41.75 57.65,42.85 U3_Cell12.2@57.675,42.875
NetR1_Cell12_2: R1_Cell12.2 U3_Cell12.3 | length 1.3
  Top Layer (Signal) w0.4: U3_Cell12.3@58.325,42.875 58.35,42.85 58.35,41.75 R1_Cell12.2@58.45,41.65
NetR1_Cell13_1: R1_Cell13.1 U3_Cell13.2 | length 1.3
  Top Layer (Signal) w0.4: R1_Cell13.1@47.55,41.65 47.65,41.75 47.65,42.85 U3_Cell13.2@47.675,42.875
NetR1_Cell13_2: R1_Cell13.2 U3_Cell13.3 | length 1.3
  Top Layer (Signal) w0.4: U3_Cell13.3@48.325,42.875 48.35,42.85 48.35,41.75 R1_Cell13.2@48.45,41.65
NetR1_Cell14_1: R1_Cell14.1 U3_Cell14.2 | length 1.3
  Top Layer (Signal) w0.4: R1_Cell14.1@37.55,41.65 37.65,41.75 37.65,42.85 U3_Cell14.2@37.675,42.875
NetR1_Cell14_2: R1_Cell14.2 U3_Cell14.3 | length 1.3
  Top Layer (Signal) w0.4: U3_Cell14.3@38.325,42.875 38.35,42.85 38.35,41.75 R1_Cell14.2@38.45,41.65
NetR1_Cell15_1: R1_Cell15.1 U3_Cell15.2 | length 1.3
  Top Layer (Signal) w0.4: R1_Cell15.1@27.55,41.65 27.65,41.75 27.65,42.85 U3_Cell15.2@27.675,42.875
NetR1_Cell15_2: R1_Cell15.2 U3_Cell15.3 | length 1.3
  Top Layer (Signal) w0.4: U3_Cell15.3@28.325,42.875 28.35,42.85 28.35,41.75 R1_Cell15.2@28.45,41.65
NetR1_Cell16_1: R1_Cell16.1 U3_Cell16.2 | length 1.3
  Top Layer (Signal) w0.4: R1_Cell16.1@67.55,31.65 67.65,31.75 67.65,32.85 U3_Cell16.2@67.675,32.875
NetR1_Cell16_2: R1_Cell16.2 U3_Cell16.3 | length 1.3
  Top Layer (Signal) w0.4: U3_Cell16.3@68.325,32.875 68.35,32.85 68.35,31.75 R1_Cell16.2@68.45,31.65
NetR1_Cell17_1: R1_Cell17.1 U3_Cell17.2 | length 1.3
  Top Layer (Signal) w0.4: R1_Cell17.1@57.55,31.65 57.65,31.75 57.65,32.85 U3_Cell17.2@57.675,32.875
NetR1_Cell17_2: R1_Cell17.2 U3_Cell17.3 | length 1.3
  Top Layer (Signal) w0.4: U3_Cell17.3@58.325,32.875 58.35,32.85 58.35,31.75 R1_Cell17.2@58.45,31.65
NetR1_Cell18_1: R1_Cell18.1 U3_Cell18.2 | length 1.3
  Top Layer (Signal) w0.4: R1_Cell18.1@47.55,31.65 47.65,31.75 47.65,32.85 U3_Cell18.2@47.675,32.875
NetR1_Cell18_2: R1_Cell18.2 U3_Cell18.3 | length 1.3
  Top Layer (Signal) w0.4: U3_Cell18.3@48.325,32.875 48.35,32.85 48.35,31.75 R1_Cell18.2@48.45,31.65
NetR1_Cell19_1: R1_Cell19.1 U3_Cell19.2 | length 1.3
  Top Layer (Signal) w0.4: R1_Cell19.1@37.55,31.65 37.65,31.75 37.65,32.85 U3_Cell19.2@37.675,32.875
NetR1_Cell19_2: R1_Cell19.2 U3_Cell19.3 | length 1.3
  Top Layer (Signal) w0.4: U3_Cell19.3@38.325,32.875 38.35,32.85 38.35,31.75 R1_Cell19.2@38.45,31.65
NetR1_Cell20_1: R1_Cell20.1 U3_Cell20.2 | length 1.3
  Top Layer (Signal) w0.4: R1_Cell20.1@27.55,31.65 27.65,31.75 27.65,32.85 U3_Cell20.2@27.675,32.875
NetR1_Cell20_2: R1_Cell20.2 U3_Cell20.3 | length 1.3
  Top Layer (Signal) w0.4: U3_Cell20.3@28.325,32.875 28.35,32.85 28.35,31.75 R1_Cell20.2@28.45,31.65
NetR1_Cell21_1: R1_Cell21.1 U3_Cell21.2 | length 1.3
  Top Layer (Signal) w0.4: R1_Cell21.1@67.55,21.65 67.65,21.75 67.65,22.85 U3_Cell21.2@67.675,22.875
NetR1_Cell21_2: R1_Cell21.2 U3_Cell21.3 | length 1.3
  Top Layer (Signal) w0.4: U3_Cell21.3@68.325,22.875 68.35,22.85 68.35,21.75 R1_Cell21.2@68.45,21.65
NetR1_Cell22_1: R1_Cell22.1 U3_Cell22.2 | length 1.3
  Top Layer (Signal) w0.4: R1_Cell22.1@57.55,21.65 57.65,21.75 57.65,22.85 U3_Cell22.2@57.675,22.875
NetR1_Cell22_2: R1_Cell22.2 U3_Cell22.3 | length 1.3
  Top Layer (Signal) w0.4: U3_Cell22.3@58.325,22.875 58.35,22.85 58.35,21.75 R1_Cell22.2@58.45,21.65
NetR1_Cell23_1: R1_Cell23.1 U3_Cell23.2 | length 1.3
  Top Layer (Signal) w0.4: R1_Cell23.1@47.55,21.65 47.65,21.75 47.65,22.85 U3_Cell23.2@47.675,22.875
NetR1_Cell23_2: R1_Cell23.2 U3_Cell23.3 | length 1.3
  Top Layer (Signal) w0.4: U3_Cell23.3@48.325,22.875 48.35,22.85 48.35,21.75 R1_Cell23.2@48.45,21.65
NetR1_Cell24_1: R1_Cell24.1 U3_Cell24.2 | length 1.3
  Top Layer (Signal) w0.4: R1_Cell24.1@37.55,21.65 37.65,21.75 37.65,22.85 U3_Cell24.2@37.675,22.875
NetR1_Cell24_2: R1_Cell24.2 U3_Cell24.3 | length 1.3
  Top Layer (Signal) w0.4: U3_Cell24.3@38.325,22.875 38.35,22.85 38.35,21.75 R1_Cell24.2@38.45,21.65
NetR1_Cell25_1: R1_Cell25.1 U3_Cell25.2 | length 1.3
  Top Layer (Signal) w0.4: R1_Cell25.1@27.55,21.65 27.65,21.75 27.65,22.85 U3_Cell25.2@27.675,22.875
NetR1_Cell25_2: R1_Cell25.2 U3_Cell25.3 | length 1.3
  Top Layer (Signal) w0.4: U3_Cell25.3@28.325,22.875 28.35,22.85 28.35,21.75 R1_Cell25.2@28.45,21.65
OUT+_Cell1: U2_Cell1.9 U3_Cell1.4 | length 6.9
  Top Layer (Signal) w0.3: U2_Cell1.9@65.275,67.9 65.275,67.375 65.988,66.662 65.988,65.837 67.725,64.1 68.366,64.1 68.9,63.566 68.9,62.95 U3_Cell1.4@68.975,62.875
OUT+_Cell2: U2_Cell2.9 U3_Cell2.4 | length 6.9
  Top Layer (Signal) w0.3: U2_Cell2.9@55.275,67.9 55.275,67.375 55.988,66.662 55.988,65.837 57.725,64.1 58.366,64.1 58.9,63.566 58.9,62.95 U3_Cell2.4@58.975,62.875
OUT+_Cell3: U2_Cell3.9 U3_Cell3.4 | length 6.9
  Top Layer (Signal) w0.3: U2_Cell3.9@45.275,67.9 45.275,67.375 45.988,66.662 45.988,65.837 47.725,64.1 48.366,64.1 48.9,63.566 48.9,62.95 U3_Cell3.4@48.975,62.875
OUT+_Cell4: U2_Cell4.9 U3_Cell4.4 | length 6.9
  Top Layer (Signal) w0.3: U2_Cell4.9@35.275,67.9 35.275,67.375 35.988,66.662 35.988,65.837 37.725,64.1 38.366,64.1 38.9,63.566 38.9,62.95 U3_Cell4.4@38.975,62.875
OUT+_Cell5: U2_Cell5.9 U3_Cell5.4 | length 6.9
  Top Layer (Signal) w0.3: U2_Cell5.9@25.275,67.9 25.275,67.375 25.988,66.662 25.988,65.837 27.725,64.1 28.366,64.1 28.9,63.566 28.9,62.95 U3_Cell5.4@28.975,62.875
OUT+_Cell6: U2_Cell6.9 U3_Cell6.4 | length 6.9
  Top Layer (Signal) w0.3: U2_Cell6.9@65.275,57.9 65.275,57.375 65.988,56.662 65.988,55.837 67.725,54.1 68.366,54.1 68.9,53.566 68.9,52.95 U3_Cell6.4@68.975,52.875
OUT+_Cell7: U2_Cell7.9 U3_Cell7.4 | length 6.9
  Top Layer (Signal) w0.3: U2_Cell7.9@55.275,57.9 55.275,57.375 55.988,56.662 55.988,55.837 57.725,54.1 58.366,54.1 58.9,53.566 58.9,52.95 U3_Cell7.4@58.975,52.875
OUT+_Cell8: U2_Cell8.9 U3_Cell8.4 | length 6.9
  Top Layer (Signal) w0.3: U2_Cell8.9@45.275,57.9 45.275,57.375 45.988,56.662 45.988,55.837 47.725,54.1 48.366,54.1 48.9,53.566 48.9,52.95 U3_Cell8.4@48.975,52.875
OUT+_Cell9: U2_Cell9.9 U3_Cell9.4 | length 6.9
  Top Layer (Signal) w0.3: U2_Cell9.9@35.275,57.9 35.275,57.375 35.988,56.662 35.988,55.837 37.725,54.1 38.366,54.1 38.9,53.566 38.9,52.95 U3_Cell9.4@38.975,52.875
OUT+_Cell10: U2_Cell10.9 U3_Cell10.4 | length 6.9
  Top Layer (Signal) w0.3: U2_Cell10.9@25.275,57.9 25.275,57.375 25.988,56.662 25.988,55.837 27.725,54.1 28.366,54.1 28.9,53.566 28.9,52.95 U3_Cell10.4@28.975,52.875
OUT+_Cell11: U2_Cell11.9 U3_Cell11.4 | length 6.9
  Top Layer (Signal) w0.3: U2_Cell11.9@65.275,47.9 65.275,47.375 65.988,46.662 65.988,45.837 67.725,44.1 68.366,44.1 68.9,43.566 68.9,42.95 U3_Cell11.4@68.975,42.875
OUT+_Cell12: U2_Cell12.9 U3_Cell12.4 | length 6.9
  Top Layer (Signal) w0.3: U2_Cell12.9@55.275,47.9 55.275,47.375 55.988,46.662 55.988,45.837 57.725,44.1 58.366,44.1 58.9,43.566 58.9,42.95 U3_Cell12.4@58.975,42.875
OUT+_Cell13: U2_Cell13.9 U3_Cell13.4 | length 6.9
  Top Layer (Signal) w0.3: U2_Cell13.9@45.275,47.9 45.275,47.375 45.988,46.662 45.988,45.837 47.725,44.1 48.366,44.1 48.9,43.566 48.9,42.95 U3_Cell13.4@48.975,42.875
OUT+_Cell14: U2_Cell14.9 U3_Cell14.4 | length 6.9
  Top Layer (Signal) w0.3: U2_Cell14.9@35.275,47.9 35.275,47.375 35.988,46.662 35.988,45.837 37.725,44.1 38.366,44.1 38.9,43.566 38.9,42.95 U3_Cell14.4@38.975,42.875
OUT+_Cell15: U2_Cell15.9 U3_Cell15.4 | length 6.9
  Top Layer (Signal) w0.3: U2_Cell15.9@25.275,47.9 25.275,47.375 25.988,46.662 25.988,45.837 27.725,44.1 28.366,44.1 28.9,43.566 28.9,42.95 U3_Cell15.4@28.975,42.875
OUT+_Cell16: U2_Cell16.9 U3_Cell16.4 | length 6.9
  Top Layer (Signal) w0.3: U2_Cell16.9@65.275,37.9 65.275,37.375 65.988,36.662 65.988,35.837 67.725,34.1 68.366,34.1 68.9,33.566 68.9,32.95 U3_Cell16.4@68.975,32.875
OUT+_Cell17: U2_Cell17.9 U3_Cell17.4 | length 6.9
  Top Layer (Signal) w0.3: U2_Cell17.9@55.275,37.9 55.275,37.375 55.988,36.662 55.988,35.837 57.725,34.1 58.366,34.1 58.9,33.566 58.9,32.95 U3_Cell17.4@58.975,32.875
OUT+_Cell18: U2_Cell18.9 U3_Cell18.4 | length 6.9
  Top Layer (Signal) w0.3: U2_Cell18.9@45.275,37.9 45.275,37.375 45.988,36.662 45.988,35.837 47.725,34.1 48.366,34.1 48.9,33.566 48.9,32.95 U3_Cell18.4@48.975,32.875
OUT+_Cell19: U2_Cell19.9 U3_Cell19.4 | length 6.9
  Top Layer (Signal) w0.3: U2_Cell19.9@35.275,37.9 35.275,37.375 35.988,36.662 35.988,35.837 37.725,34.1 38.366,34.1 38.9,33.566 38.9,32.95 U3_Cell19.4@38.975,32.875
OUT+_Cell20: U2_Cell20.9 U3_Cell20.4 | length 6.9
  Top Layer (Signal) w0.3: U2_Cell20.9@25.275,37.9 25.275,37.375 25.988,36.662 25.988,35.837 27.725,34.1 28.366,34.1 28.9,33.566 28.9,32.95 U3_Cell20.4@28.975,32.875
OUT+_Cell21: U2_Cell21.9 U3_Cell21.4 | length 6.9
  Top Layer (Signal) w0.3: U2_Cell21.9@65.275,27.9 65.275,27.375 65.988,26.662 65.988,25.837 67.725,24.1 68.366,24.1 68.9,23.566 68.9,22.95 U3_Cell21.4@68.975,22.875
OUT+_Cell22: U2_Cell22.9 U3_Cell22.4 | length 6.9
  Top Layer (Signal) w0.3: U2_Cell22.9@55.275,27.9 55.275,27.375 55.988,26.662 55.988,25.837 57.725,24.1 58.366,24.1 58.9,23.566 58.9,22.95 U3_Cell22.4@58.975,22.875
OUT+_Cell23: U2_Cell23.9 U3_Cell23.4 | length 6.9
  Top Layer (Signal) w0.3: U2_Cell23.9@45.275,27.9 45.275,27.375 45.988,26.662 45.988,25.837 47.725,24.1 48.366,24.1 48.9,23.566 48.9,22.95 U3_Cell23.4@48.975,22.875
OUT+_Cell24: U2_Cell24.9 U3_Cell24.4 | length 6.9
  Top Layer (Signal) w0.3: U2_Cell24.9@35.275,27.9 35.275,27.375 35.988,26.662 35.988,25.837 37.725,24.1 38.366,24.1 38.9,23.566 38.9,22.95 U3_Cell24.4@38.975,22.875
OUT+_Cell25: U2_Cell25.9 U3_Cell25.4 | length 6.9
  Top Layer (Signal) w0.3: U2_Cell25.9@25.275,27.9 25.275,27.375 25.988,26.662 25.988,25.837 27.725,24.1 28.366,24.1 28.9,23.566 28.9,22.95 U3_Cell25.4@28.975,22.875
OUT+A_Cell1: U1_Cell1.16 U2_Cell1.12 | length 2.5
  Top Layer (Signal) w0.3: v1(63.325,66.85) U2_Cell1.12@63.325,67.9
  Bottom Layer (Signal) w0.3: U1_Cell1.16@61.876,66.905 61.903,66.877 63.298,66.877 v1(63.325,66.85)
OUT+A_Cell2: U1_Cell2.16 U2_Cell2.12 | length 2.5
  Top Layer (Signal) w0.3: v1(53.325,66.85) U2_Cell2.12@53.325,67.9
  Bottom Layer (Signal) w0.3: U1_Cell2.16@51.876,66.905 51.904,66.877 53.298,66.877 v1(53.325,66.85)
OUT+A_Cell3: U1_Cell3.16 U2_Cell3.12 | length 2.5
  Top Layer (Signal) w0.3: v1(43.325,66.85) U2_Cell3.12@43.325,67.9
  Bottom Layer (Signal) w0.3: U1_Cell3.16@41.876,66.905 41.903,66.877 43.298,66.877 v1(43.325,66.85)
OUT+A_Cell4: U1_Cell4.16 U2_Cell4.12 | length 2.5
  Top Layer (Signal) w0.3: v1(33.325,66.85) U2_Cell4.12@33.325,67.9
  Bottom Layer (Signal) w0.3: U1_Cell4.16@31.876,66.905 31.903,66.877 33.298,66.877 v1(33.325,66.85)
OUT+A_Cell5: U1_Cell5.16 U2_Cell5.12 | length 2.5
  Top Layer (Signal) w0.3: v1(23.325,66.85) U2_Cell5.12@23.325,67.9
  Bottom Layer (Signal) w0.3: U1_Cell5.16@21.876,66.905 21.903,66.877 23.298,66.877 v1(23.325,66.85)
OUT+A_Cell6: U1_Cell6.16 U2_Cell6.12 | length 2.5
  Top Layer (Signal) w0.3: v1(63.325,56.85) U2_Cell6.12@63.325,57.9
  Bottom Layer (Signal) w0.3: U1_Cell6.16@61.876,56.905 61.903,56.877 63.298,56.877 v1(63.325,56.85)
OUT+A_Cell7: U1_Cell7.16 U2_Cell7.12 | length 2.5
  Top Layer (Signal) w0.3: v1(53.325,56.85) U2_Cell7.12@53.325,57.9
  Bottom Layer (Signal) w0.3: U1_Cell7.16@51.876,56.905 51.904,56.877 53.298,56.877 v1(53.325,56.85)
OUT+A_Cell8: U1_Cell8.16 U2_Cell8.12 | length 2.5
  Top Layer (Signal) w0.3: v1(43.325,56.85) U2_Cell8.12@43.325,57.9
  Bottom Layer (Signal) w0.3: U1_Cell8.16@41.876,56.905 41.903,56.877 43.298,56.877 v1(43.325,56.85)
OUT+A_Cell9: U1_Cell9.16 U2_Cell9.12 | length 2.5
  Top Layer (Signal) w0.3: v1(33.325,56.85) U2_Cell9.12@33.325,57.9
  Bottom Layer (Signal) w0.3: U1_Cell9.16@31.876,56.905 31.903,56.877 33.298,56.877 v1(33.325,56.85)
OUT+A_Cell10: U1_Cell10.16 U2_Cell10.12 | length 2.5
  Top Layer (Signal) w0.3: v1(23.325,56.85) U2_Cell10.12@23.325,57.9
  Bottom Layer (Signal) w0.3: U1_Cell10.16@21.876,56.905 21.903,56.877 23.298,56.877 v1(23.325,56.85)
OUT+A_Cell11: U1_Cell11.16 U2_Cell11.12 | length 2.5
  Top Layer (Signal) w0.3: v1(63.325,46.85) U2_Cell11.12@63.325,47.9
  Bottom Layer (Signal) w0.3: U1_Cell11.16@61.876,46.905 61.903,46.877 63.298,46.877 v1(63.325,46.85)
OUT+A_Cell12: U1_Cell12.16 U2_Cell12.12 | length 2.5
  Top Layer (Signal) w0.3: v1(53.325,46.85) U2_Cell12.12@53.325,47.9
  Bottom Layer (Signal) w0.3: U1_Cell12.16@51.876,46.905 51.904,46.877 53.298,46.877 v1(53.325,46.85)
OUT+A_Cell13: U1_Cell13.16 U2_Cell13.12 | length 2.5
  Top Layer (Signal) w0.3: v1(43.325,46.85) U2_Cell13.12@43.325,47.9
  Bottom Layer (Signal) w0.3: U1_Cell13.16@41.876,46.905 41.903,46.877 43.298,46.877 v1(43.325,46.85)
OUT+A_Cell14: U1_Cell14.16 U2_Cell14.12 | length 2.5
  Top Layer (Signal) w0.3: v1(33.325,46.85) U2_Cell14.12@33.325,47.9
  Bottom Layer (Signal) w0.3: U1_Cell14.16@31.876,46.905 31.903,46.877 33.298,46.877 v1(33.325,46.85)
OUT+A_Cell15: U1_Cell15.16 U2_Cell15.12 | length 2.5
  Top Layer (Signal) w0.3: v1(23.325,46.85) U2_Cell15.12@23.325,47.9
  Bottom Layer (Signal) w0.3: U1_Cell15.16@21.876,46.905 21.903,46.877 23.298,46.877 v1(23.325,46.85)
OUT+A_Cell16: U1_Cell16.16 U2_Cell16.12 | length 2.5
  Top Layer (Signal) w0.3: v1(63.325,36.85) U2_Cell16.12@63.325,37.9
  Bottom Layer (Signal) w0.3: U1_Cell16.16@61.876,36.905 61.903,36.878 63.298,36.878 v1(63.325,36.85)
OUT+A_Cell17: U1_Cell17.16 U2_Cell17.12 | length 2.5
  Top Layer (Signal) w0.3: v1(53.325,36.85) U2_Cell17.12@53.325,37.9
  Bottom Layer (Signal) w0.3: U1_Cell17.16@51.876,36.905 51.904,36.878 53.298,36.878 v1(53.325,36.85)
OUT+A_Cell18: U1_Cell18.16 U2_Cell18.12 | length 2.5
  Top Layer (Signal) w0.3: v1(43.325,36.85) U2_Cell18.12@43.325,37.9
  Bottom Layer (Signal) w0.3: U1_Cell18.16@41.876,36.905 41.903,36.878 43.298,36.878 v1(43.325,36.85)
OUT+A_Cell19: U1_Cell19.16 U2_Cell19.12 | length 2.5
  Top Layer (Signal) w0.3: v1(33.325,36.85) U2_Cell19.12@33.325,37.9
  Bottom Layer (Signal) w0.3: U1_Cell19.16@31.876,36.905 31.903,36.878 33.298,36.878 v1(33.325,36.85)
OUT+A_Cell20: U1_Cell20.16 U2_Cell20.12 | length 2.5
  Top Layer (Signal) w0.3: v1(23.325,36.85) U2_Cell20.12@23.325,37.9
  Bottom Layer (Signal) w0.3: U1_Cell20.16@21.876,36.905 21.903,36.878 23.298,36.878 v1(23.325,36.85)
OUT+A_Cell21: U1_Cell21.16 U2_Cell21.12 | length 2.5
  Top Layer (Signal) w0.3: v1(63.325,26.85) U2_Cell21.12@63.325,27.9
  Bottom Layer (Signal) w0.3: U1_Cell21.16@61.876,26.905 61.903,26.878 63.298,26.878 v1(63.325,26.85)
OUT+A_Cell22: U1_Cell22.16 U2_Cell22.12 | length 2.5
  Top Layer (Signal) w0.3: v1(53.325,26.85) U2_Cell22.12@53.325,27.9
  Bottom Layer (Signal) w0.3: U1_Cell22.16@51.876,26.905 51.904,26.878 53.298,26.878 v1(53.325,26.85)
OUT+A_Cell23: U1_Cell23.16 U2_Cell23.12 | length 2.5
  Top Layer (Signal) w0.3: v1(43.325,26.85) U2_Cell23.12@43.325,27.9
  Bottom Layer (Signal) w0.3: U1_Cell23.16@41.876,26.905 41.903,26.878 43.298,26.878 v1(43.325,26.85)
OUT+A_Cell24: U1_Cell24.16 U2_Cell24.12 | length 2.5
  Top Layer (Signal) w0.3: v1(33.325,26.85) U2_Cell24.12@33.325,27.9
  Bottom Layer (Signal) w0.3: U1_Cell24.16@31.876,26.905 31.903,26.878 33.298,26.878 v1(33.325,26.85)
OUT+A_Cell25: U1_Cell25.16 U2_Cell25.12 | length 2.5
  Top Layer (Signal) w0.3: v1(23.325,26.85) U2_Cell25.12@23.325,27.9
  Bottom Layer (Signal) w0.3: U1_Cell25.16@21.876,26.905 21.903,26.878 23.298,26.878 v1(23.325,26.85)
OUT+B_Cell1: U1_Cell1.12 U2_Cell1.11 | length 6.4
  Top Layer (Signal) w0.3: v1(63.975,65.625) U2_Cell1.11@63.975,67.9
  Bottom Layer (Signal) w0.3: U1_Cell1.12@63.095,61.877 63.095,62.312 64.025,63.242 64.025,65.521 63.975,65.571 v1(63.975,65.625)
OUT+B_Cell2: U1_Cell2.12 U2_Cell2.11 | length 6.4
  Top Layer (Signal) w0.3: v1(53.975,65.625) U2_Cell2.11@53.975,67.9
  Bottom Layer (Signal) w0.3: U1_Cell2.12@53.095,61.877 53.095,62.312 54.025,63.242 54.025,65.521 53.975,65.571 v1(53.975,65.625)
OUT+B_Cell3: U1_Cell3.12 U2_Cell3.11 | length 6.4
  Top Layer (Signal) w0.3: v1(43.975,65.625) U2_Cell3.11@43.975,67.9
  Bottom Layer (Signal) w0.3: U1_Cell3.12@43.095,61.877 43.095,62.312 44.025,63.242 44.025,65.521 43.975,65.571 v1(43.975,65.625)
OUT+B_Cell4: U1_Cell4.12 U2_Cell4.11 | length 6.4
  Top Layer (Signal) w0.3: v1(33.975,65.625) U2_Cell4.11@33.975,67.9
  Bottom Layer (Signal) w0.3: U1_Cell4.12@33.095,61.877 33.095,62.312 34.025,63.242 34.025,65.521 33.975,65.571 v1(33.975,65.625)
OUT+B_Cell5: U1_Cell5.12 U2_Cell5.11 | length 6.4
  Top Layer (Signal) w0.3: v1(23.975,65.625) U2_Cell5.11@23.975,67.9
  Bottom Layer (Signal) w0.3: U1_Cell5.12@23.095,61.877 23.095,62.312 24.025,63.242 24.025,65.521 23.975,65.571 v1(23.975,65.625)
OUT+B_Cell6: U1_Cell6.12 U2_Cell6.11 | length 6.4
  Top Layer (Signal) w0.3: v1(63.975,55.625) U2_Cell6.11@63.975,57.9
  Bottom Layer (Signal) w0.3: U1_Cell6.12@63.095,51.877 63.095,52.312 64.025,53.242 64.025,55.521 63.975,55.571 v1(63.975,55.625)
OUT+B_Cell7: U1_Cell7.12 U2_Cell7.11 | length 6.4
  Top Layer (Signal) w0.3: v1(53.975,55.625) U2_Cell7.11@53.975,57.9
  Bottom Layer (Signal) w0.3: U1_Cell7.12@53.095,51.877 53.095,52.312 54.025,53.242 54.025,55.521 53.975,55.571 v1(53.975,55.625)
OUT+B_Cell8: U1_Cell8.12 U2_Cell8.11 | length 6.4
  Top Layer (Signal) w0.3: v1(43.975,55.625) U2_Cell8.11@43.975,57.9
  Bottom Layer (Signal) w0.3: U1_Cell8.12@43.095,51.877 43.095,52.312 44.025,53.242 44.025,55.521 43.975,55.571 v1(43.975,55.625)
OUT+B_Cell9: U1_Cell9.12 U2_Cell9.11 | length 6.4
  Top Layer (Signal) w0.3: v1(33.975,55.625) U2_Cell9.11@33.975,57.9
  Bottom Layer (Signal) w0.3: U1_Cell9.12@33.095,51.877 33.095,52.312 34.025,53.242 34.025,55.521 33.975,55.571 v1(33.975,55.625)
OUT+B_Cell10: U1_Cell10.12 U2_Cell10.11 | length 6.4
  Top Layer (Signal) w0.3: v1(23.975,55.625) U2_Cell10.11@23.975,57.9
  Bottom Layer (Signal) w0.3: U1_Cell10.12@23.095,51.877 23.095,52.312 24.025,53.242 24.025,55.521 23.975,55.571 v1(23.975,55.625)
OUT+B_Cell11: U1_Cell11.12 U2_Cell11.11 | length 6.4
  Top Layer (Signal) w0.3: v1(63.975,45.625) U2_Cell11.11@63.975,47.9
  Bottom Layer (Signal) w0.3: U1_Cell11.12@63.095,41.877 63.095,42.312 64.025,43.242 64.025,45.521 63.975,45.571 v1(63.975,45.625)
OUT+B_Cell12: U1_Cell12.12 U2_Cell12.11 | length 6.4
  Top Layer (Signal) w0.3: v1(53.975,45.625) U2_Cell12.11@53.975,47.9
  Bottom Layer (Signal) w0.3: U1_Cell12.12@53.095,41.877 53.095,42.312 54.025,43.242 54.025,45.521 53.975,45.571 v1(53.975,45.625)
OUT+B_Cell13: U1_Cell13.12 U2_Cell13.11 | length 6.4
  Top Layer (Signal) w0.3: v1(43.975,45.625) U2_Cell13.11@43.975,47.9
  Bottom Layer (Signal) w0.3: U1_Cell13.12@43.095,41.877 43.095,42.312 44.025,43.242 44.025,45.521 43.975,45.571 v1(43.975,45.625)
OUT+B_Cell14: U1_Cell14.12 U2_Cell14.11 | length 6.4
  Top Layer (Signal) w0.3: v1(33.975,45.625) U2_Cell14.11@33.975,47.9
  Bottom Layer (Signal) w0.3: U1_Cell14.12@33.095,41.877 33.095,42.312 34.025,43.242 34.025,45.521 33.975,45.571 v1(33.975,45.625)
OUT+B_Cell15: U1_Cell15.12 U2_Cell15.11 | length 6.4
  Top Layer (Signal) w0.3: v1(23.975,45.625) U2_Cell15.11@23.975,47.9
  Bottom Layer (Signal) w0.3: U1_Cell15.12@23.095,41.877 23.095,42.312 24.025,43.242 24.025,45.521 23.975,45.571 v1(23.975,45.625)
OUT+B_Cell16: U1_Cell16.12 U2_Cell16.11 | length 6.4
  Top Layer (Signal) w0.3: v1(63.975,35.625) U2_Cell16.11@63.975,37.9
  Bottom Layer (Signal) w0.3: U1_Cell16.12@63.095,31.877 63.095,32.312 64.025,33.242 64.025,35.521 63.975,35.571 v1(63.975,35.625)
OUT+B_Cell17: U1_Cell17.12 U2_Cell17.11 | length 6.4
  Top Layer (Signal) w0.3: v1(53.975,35.625) U2_Cell17.11@53.975,37.9
  Bottom Layer (Signal) w0.3: U1_Cell17.12@53.095,31.877 53.095,32.312 54.025,33.242 54.025,35.521 53.975,35.571 v1(53.975,35.625)
OUT+B_Cell18: U1_Cell18.12 U2_Cell18.11 | length 6.4
  Top Layer (Signal) w0.3: v1(43.975,35.625) U2_Cell18.11@43.975,37.9
  Bottom Layer (Signal) w0.3: U1_Cell18.12@43.095,31.877 43.095,32.312 44.025,33.242 44.025,35.521 43.975,35.571 v1(43.975,35.625)
OUT+B_Cell19: U1_Cell19.12 U2_Cell19.11 | length 6.4
  Top Layer (Signal) w0.3: v1(33.975,35.625) U2_Cell19.11@33.975,37.9
  Bottom Layer (Signal) w0.3: U1_Cell19.12@33.095,31.877 33.095,32.312 34.025,33.242 34.025,35.521 33.975,35.571 v1(33.975,35.625)
OUT+B_Cell20: U1_Cell20.12 U2_Cell20.11 | length 6.4
  Top Layer (Signal) w0.3: v1(23.975,35.625) U2_Cell20.11@23.975,37.9
  Bottom Layer (Signal) w0.3: U1_Cell20.12@23.095,31.877 23.095,32.312 24.025,33.242 24.025,35.521 23.975,35.571 v1(23.975,35.625)